# Altium PCB 蓝牙钥匙球锁20714.PcbDoc (part 2 of 2)
Units mil, origin at the board's own origin, x right, y up, seen from the top; angles counter-clockwise.
Board outline 1980 x 1974 mil, 2 copper layers (Top Layer, Bottom Layer); 82 components, 54 nets, 258 pads, 220 vias.
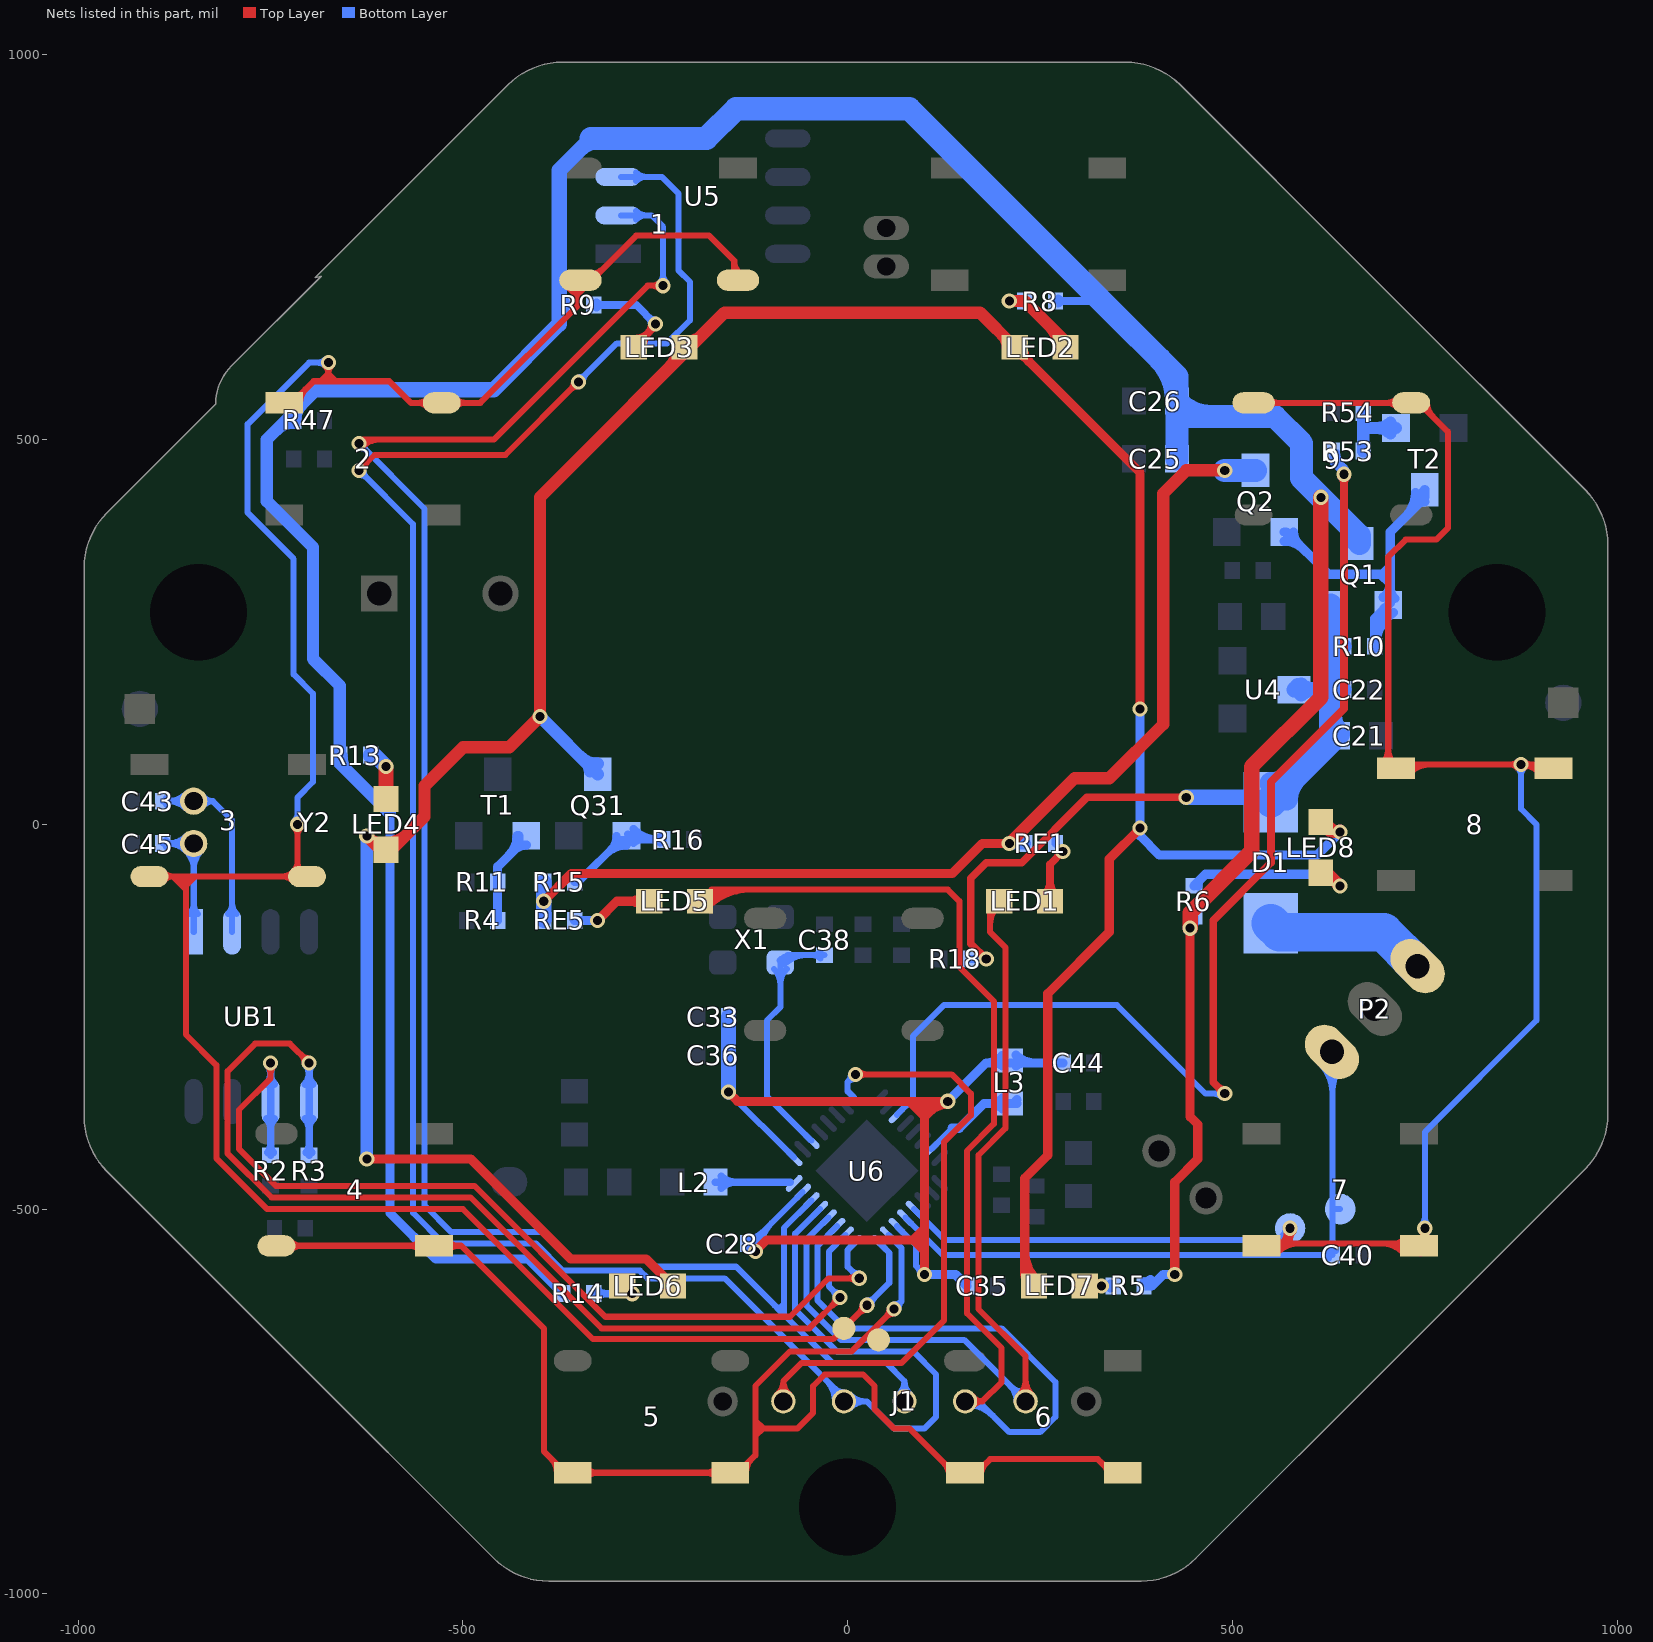
[diagram p2: the nets of this part, all layers, seen from the top]

## Via types
v1: diameter 19.68, hole 11.81, Top Layer to Bottom Layer, tented both sides, 219 vias
v2: diameter 19.68, hole 11.81, Top Layer to Bottom Layer, tented top, 1 vias

## Nets (pads, with @x,y where several pads share a name; then routed paths per layer and width w, separated by ;. In a path a pad name is that pad's centre, name@x,y a point inside that pad or via, vN(x,y) a via of type N, cw(c..) or ccw(c..) an arc to the next point about the centre after c; other vN are vias at no path point) (continued)
NetC38_2: C38.2 U6.3 X1.3 | length 443
  Bottom Layer w7.87: X1.3@-95.95,-187.88 cw(c-116.11,-208.04) -87.6,-208.04 cw(c-59.08,-208.04) X1.3@-79.25,-187.88 ; X1.3@-88.41,-176.74 cw(c-72.13,-193.02) X1.3@-72.13,-170 ; X1.3@-82.85,-182.31 cw(c-53.12,-212.03) -53.12,-170 ; U6.3@-47.38,-411.03 -105,-353.41 -105,-255 -87.6,-237.6 X1.3@-87.6,-179.53 -78.07,-170 C38.2@-30,-170 ; C38.2@-35.29,-174.29 ccw(c-45.64,-184.64) -45.64,-170 ccw(c-45.64,-155.36) C38.2@-35.29,-165.71
NetC43_1: C43.1 UB1.2 Y2.2 | length 496.5
  Bottom Layer w8: C43.1@-883.4,30 ccw(c-883.4,63.52) -859.7,39.82 cw(c-883.11,63.23) -883.11,30.12 cw(c-883.11,-2.99) -859.7,20.42 ccw(c-882.83,-2.71) C43.1@-882.83,30 ; -875.8,30.12 cw(c-875.8,44.2) -885.76,34.24 ccw(c-875.51,44.49) -875.51,30 ccw(c-875.51,15.51) -885.76,25.76 cw(c-875.23,15.23) -875.23,30.12 ; Y2.2@-838.49,22.67 cw(c-825,13.94) -825,30 ; Y2.2@-838.38,37.4 ccw(c-825,45.79) -825,30 ; UB1.2@-805.52,-116.52 ccw(c-818.86,-103.19) -800,-103.19 ccw(c-781.14,-103.19) UB1.2@-794.48,-116.52 ; UB1.2@-800,-139.76 -800,5 -825,30 ; Y2.2@-849.88,30 Y2.2@-850,30.12 -889.88,30.12 C43.1@-890,30 Y2.2@-849.88,30 ; Y2.2@-849.88,30 -825,30
NetC45_2: C45.2 UB1.1 Y2.1 | length 311.2
  Bottom Layer w8: C45.2@-890,-25 Y2.1@-850,-25 UB1.1@-850,-139.76 ; C45.2@-885.76,-29.24 cw(c-875.51,-39.49) -875.51,-25 cw(c-875.51,-10.51) C45.2@-885.76,-20.76 ; Y2.1@-859.7,-15.3 cw(c-883.11,8.11) -883.11,-25 cw(c-883.11,-58.11) -859.7,-34.7 cw(c-883.11,-58.11) -850,-58.11 cw(c-816.89,-58.11) Y2.1@-840.3,-34.7 ; UB1.1@-855.52,-116.52 ccw(c-868.86,-103.19) -850,-103.19 ccw(c-831.14,-103.19) UB1.1@-844.48,-116.52
NetD1_1: D1.1 P2.1 | length 213.7
  Bottom Layer w50: D1.1@550,-128.74 561.26,-140 696.36,-140 P2.1@740.68,-184.32
NetL2_2: L2.2 U6.32 | length 137.8
  Bottom Layer w10: L2.2@-172,-465 -75,-465 ; L2.2@-164.4,-472.6 cw(c-146.05,-490.95) -146.05,-465 cw(c-146.05,-439.05) L2.2@-164.4,-457.4
NetL3_2: L3.2 U6.15 | length 180
  Bottom Layer w7.87: U6.15@108.52,-422.16 135.68,-395
  Bottom Layer w12: 135.68,-395 145,-395 177,-363 L3.2@215,-363 ; L3.2@201.14,-369.89 ccw(c184.5,-386.53) 184.5,-363 ccw(c184.5,-339.47) L3.2@201.14,-356.11 ; L3.2@220,-363 L3.2@215,-363 ; L3.2@220,-358 L3.2@215,-363
NetLED1_1: LED1.1 RE1.2 | length 118.3
  Top Layer w10: LED1.1@255.22,-92.22 ccw(c236.44,-73.44) 263,-73.44 ccw(c289.56,-73.44) LED1.1@270.78,-92.22 ; LED1.1@263,-100 263,-51.75 v1(279.5,-35.25)
  Bottom Layer w10: RE1.2@270,-25 RE1.2@270,-20
NetLED2_1: LED2.1 R8.2 | length 152.5
  Top Layer w15.75: v1(210,680) 230,680 283,627 LED2.1@283,620 ; 262.47,647.53 cw(c234.94,620) LED2.1@273.87,620
  Bottom Layer w15.75: v1(210,680) R8.2@230,680
NetLED2_2: LED2.2 LED3.2 LED4.2 LED6.2 LED7.2 LED8.2 Q31.C | length 4353.9
  Top Layer w12: v1(-625,-435) -490,-435 -360,-565 -262,-565 LED6.2@-227,-600 ; -245.78,-581.22 cw(c-264.56,-600) LED6.2@-238,-600 ; LED6.2@-240.95,-586.05 ccw(c-229,-574.1) LED6.2@-229,-591 ; LED2.2@217,620 380,457 v1(380,150) ; LED2.2@219,611 cw(c219,594.1) LED2.2@230.95,606.05 ; LED2.2@228,620 ccw(c254.56,620) 235.78,601.22 ; 230,-583.1 ccw(c256.9,-583.1) LED7.2@237.88,-602.12 ; 230,-554.13 ccw(c285.87,-554.13) LED7.2@246.36,-593.64 ; LED7.2@242,-600 242,-597 230,-585 230,-460 260,-430 260,-220 340,-140 340,-45 v1(380,-5)
  Top Layer w16: v1(-625,-15) -607,-33 LED4.2@-600,-33 -593,-33 -550,10 -550,50 -500,100 -440,100 v1(-400,140) -400,425 -160,665 172,665 LED2.2@217,620 ; v1@-620.5,-19.5 ccw(c-607.18,-6.18) LED4.2@-601.95,-24.28 ; LED4.2@-600,-24 ccw(c-600,14.63) -572.69,-12.69 ; -232.31,592.69 ccw(c-259.63,620) LED3.2@-221,620 ; LED3.2@-210,627 ccw(c-210,655.97) -189.52,635.49 ; LED2.2@201.64,635.36 cw(c186.27,620) LED2.2@208,620 ; LED8.2@615,3 628,-10 v1(640,-10) cw(c640,9.36) LED8.2@621.64,3.22 ; LED8.2@621,-3 ccw(c634.92,10.92) v1@639.57,-8.21
  Bottom Layer w12: v1(380,150) v1(380,-5) 380,-15 405,-40 610,-40 v1(640,-10)
  Bottom Layer w16: v1(-625,-435) v1(-625,-15) ; v1(-400,140) Q31.C@-325,65 ; -348.31,88.31 ccw(c-325,111.62) Q31.C@-325,78.65 ; Q31.C@-339.49,79.49 cw(c-350.32,68.65) Q31.C@-335,68.65
NetLED3_1: LED3.1 R9.2 | length 224
  Top Layer w10: LED3.1@-278,620 -250,648 v1(-250,650) ; LED3.1@-277,631 ccw(c-277,655.14) -259.93,638.07 ; LED3.1@-266,620 cw(c-237.03,620) -257.51,640.49 ; -259.68,638.32 ccw(c-271.36,650) v1@-254.84,650
  Bottom Layer w10: R9.2@-330,675 -275,675 v1(-250,650) ; R9.2@-326.46,671.46 cw(c-317.93,662.93) -317.93,675 cw(c-317.93,687.07) R9.2@-326.46,678.54 ; v1@-254.84,650 ccw(c-266.53,650) -258.27,658.27 ccw(c-250,666.53) v1@-250,654.84
NetLED4_1: LED4.1 R13.2 | length 79.6
  Top Layer w20: LED4.1@-600,33 v1(-600,75)
  Bottom Layer w20: R13.2@-620,89 cw(c-620,74.51) -609.76,84.76 ; R13.2@-620,90 -615,90 v1(-600,75)
NetLED5_1: LED5.1 RE5.2 | length 145.3
  Top Layer w12: v1(-325,-125) -300,-100 LED5.1@-258,-100 ; LED5.1@-266.07,-107.07 ccw(c-283.14,-124.14) -283.14,-100 ccw(c-283.14,-75.86) LED5.1@-266.07,-92.93
  Bottom Layer w12: RE5.2@-355,-125 v1(-325,-125)
NetLED6_1: LED6.1 R14.2 | length 84.3
  Top Layer w10: LED6.1@-295,-600 LED6.1@-293,-600
  Bottom Layer w10: R14.2@-330,-610 v1@-285,-610 ; R14.2@-323.54,-613.54 cw(c-315,-622.07) -315,-610 cw(c-315,-597.93) R14.2@-323.54,-606.46 ; v1@-283.42,-613.42 ccw(c-291.69,-621.69) -291.69,-610 ccw(c-291.69,-598.31) v1@-283.42,-606.58
  other v1: -280,-610
NetLED7_1: LED7.1 R5.2 | length 127.8
  Top Layer w10: LED7.1@308,-607 LED7.1@308,-600 v1(330,-600) ; LED7.1@318.04,-606.26 cw(c330,-614.54) v1(330,-600) ; LED7.1@318.04,-593.74 ccw(c330,-585.46) v1(330,-600) ; v1@326.58,-603.42 ccw(c318.31,-611.69) 318.31,-600 ccw(c318.31,-588.31) v1@326.58,-596.58
  Bottom Layer w10: v1(330,-600) R5.2@345,-600 ; v1@333.42,-603.42 cw(c341.69,-611.69) 341.69,-600 cw(c341.69,-588.31) v1@333.42,-596.58 ; R5.2@341.46,-603.54 ccw(c332.93,-612.07) 332.93,-600 ccw(c332.93,-587.93) R5.2@341.46,-596.46
NetLED8_1: LED8.1 R6.2 | length 243.9
  Top Layer w16: LED8.1@615,-63 623,-63 v1(640,-80)
  Bottom Layer w12: R6.2@450,-80 465,-65 625,-65 v1(640,-80) ; R6.2@455,-80 cw(c467.07,-80) R6.2@458.54,-71.46
NetQ1_G: Q1.G Q2.G R10.2 T2.3 | length 668
  Bottom Layer w12: Q2.G@567.4,368 cw(c567.4,332.76) 592.32,357.68 ; Q2.G@567.4,380 570,380 625,325 692.46,325 ; Q2.G@579.4,380 ccw(c602.1,380) 586.05,363.95 ; R10.2@685,228.66 cw(c741.67,228.66) Q1.G@709.26,275.16 ; R10.2@685,231.42 685,267.6 Q1.G@702.4,285 ; 685,251.66 cw(c725.64,251.66) Q1.G@702.4,285 ; Q1.G@695.69,294.95 ccw(c683.88,312.45) 705,312.45 ; 705,307.7 ccw(c725.1,307.7) Q1.G@710.89,293.49 ; 725.03,400.03 ccw(c693.71,431.35) T2.3@738,431.35 ; T2.3@740.35,415.35 cw(c750,405.7) T2.3@750,419.35 ; 692.46,325 695,325 ; 692.46,325 705,312.46 ; 695,325 705,325 ; 695,325 705,335 ; Q1.G@702.4,285 705,287.6 705,312.46 ; 705,312.46 705,325 ; 705,325 705,335 ; 705,335 705,380 T2.3@740,415 ; T2.3@740,415 740,425 T2.3@750,435 750,425 T2.3@740,415
NetQ31_B: Q31.B R15.1 R16.2 | length 295.3
  Bottom Layer w10: R15.1@-355,-75 -350,-75 -295,-20 R16.2@-240,-20 ; R15.1@-355,-69 ccw(c-355,-42.44) -336.22,-61.22 ; -313.89,-38.89 cw(c-287.6,-65.18) Q31.B@-287.6,-28 ; -308.09,-33.09 ccw(c-326.18,-15) Q31.B@-300.6,-15 ; Q31.B@-285.48,-12.88 ccw(c-268.28,4.31) -268.28,-20 ccw(c-268.28,-34.31) Q31.B@-278.41,-24.19 ; Q31.B@-278.41,-5.81 ccw(c-244.14,28.46) R16.2@-244.14,-20 ; R16.2@-243.54,-23.54 ccw(c-252.07,-32.07) -252.07,-20 ccw(c-252.07,-7.93) R16.2@-243.54,-16.46
NetR1_2: 
NetR4_1: R4.1 R11.1 T1.1 | length 166.9
  Bottom Layer w12: R4.1@-455,-125 R11.1@-455,-75 -455,-55 -427.6,-27.6 T1.1@-427.6,-15 ; -439.92,-39.92 ccw(c-464.84,-15) T1.1@-429.6,-15 ; -433.65,-33.65 cw(c-417.6,-49.7) T1.1@-417.6,-27
NetR53_2: R53.2 R54.2 T2.1 | length 130.5
  Bottom Layer w16: R53.2@670,485 670,515 ; R54.2@670,535 670,515 ; T2.1@705.53,507.93 ccw(c688.46,490.86) 688.46,515 ccw(c688.46,539.14) T2.1@705.53,522.07 ; T2.1@712.6,515 670,515
P04/LED_RED: J1.3 LED5.2 U6.27 | length 1966.6
  Top Layer w7.87: LED5.2@-193.31,-96.69 cw(c-165.1,-124.9) -165.1,-85 ; LED5.2@-192,-100 -177,-85 130,-85 145,-100 145,-185 190,-230 190,-389.4 155,-424.4 155,-635.6 200,-680.6 200,-725 175,-750 ; LED5.2@-187.75,-102.26 cw(c-146.09,-143.91) -146.09,-85 ; LED5.2@-182.18,-107.82 cw(c-127.08,-162.92) -127.08,-85 ; J1.3@152.52,-750 175,-750 ; J1.3@162.25,-756.7 cw(c175,-765.49) 175,-750 ; J1.3@162.25,-743.3 ccw(c175,-734.51) 175,-750
  Bottom Layer w7.87: U6.27@-13.97,-522.38 -39.13,-547.54 -39.13,-619.06 -3.2,-655 200,-655 270,-725 270,-770 250,-790 210,-790 170,-750 J1.3@152.52,-750 ; J1.3@152.52,-753.94 cw(c152.52,-805.64) 189.08,-769.08 ; J1.3@152.52,-746.06 cw(c152.52,-778.76) 175.64,-755.64
P05/LED_GREEN: J1.2 LED1.2 U6.28 | length 1331.6
  Top Layer w7.87: 185,-131.84 cw(c226.84,-131.84) LED1.2@197.25,-102.25 ; 185,-125.64 185,-140 ; LED1.2@185,-112.83 cw(c207.83,-112.83) LED1.2@191.69,-96.69 ; LED1.2@205,-108 LED1.2@197,-100 185,-112 185,-140 ; J1.2@222.91,-741.65 ccw(c202.75,-721.49) 231.26,-721.49 ccw(c259.77,-721.49) J1.2@239.61,-741.65 ; J1.2@231.26,-750 231.26,-691.26 170,-630 170,-430 205,-395 205,-225 205,-160 185,-140
  Bottom Layer w7.87: U6.28@-25.11,-511.25 -53.7,-539.84 -53.7,-625.1 -8.8,-670 151.26,-670 J1.2@231.26,-750 ; J1.2@219.45,-750 ccw(c190.93,-750) 211.1,-729.84 ccw(c231.26,-709.67) J1.2@231.26,-738.19
P06/MOTO1: J1.5 U5.3 U6.29 | length 3207.4
  Top Layer w7.87: v1(-635,460) -615,480 -445,480 v1(-350,575) ; v1@-635,465.91 ccw(c-635,480.16) -624.92,470.08 ccw(c-614.84,460) v1@-629.09,460 ; v1@-355.91,575 cw(c-370.16,575) -360.08,564.92 cw(c-350,554.84) v1@-350,569.09
  Bottom Layer w7.87: v1@-635,454.09 cw(c-635,439.84) -624.92,449.92 cw(c-614.84,460) v1@-629.09,460 ; v1(-635,460) -565,390 -565,-505 -525,-545 -405,-545 -370,-580 -270,-580 -260,-590 -160,-590 -4.96,-745.04 J1.5@-4.96,-750 25,-750 60,-785 100,-785 115,-770 115,-715 85,-685 -14.4,-685 -68.27,-631.13 -68.27,-532.13 U6.29@-36.25,-500.11 ; v1(-350,575) -300,625 -235,625 -205,655 -205,705 -220,720 -220,820 -241.41,841.41 U5.3@-294.29,841.41 ; v1@-350,580.91 ccw(c-350,595.16) -339.92,585.08 ccw(c-329.84,575) v1@-344.09,575 ; U5.3@-275.18,835.84 cw(c-261.74,822.4) -261.74,841.41 cw(c-261.74,860.42) U5.3@-275.18,846.98 ; -28.63,-721.37 cw(c-57.26,-750) J1.5@-16.77,-750 ; -16.65,-733.35 ccw(c-4.96,-721.65) J1.5@-4.96,-738.19 ; -15.19,-734.81 cw(c-30.38,-750) J1.5@-8.9,-750 ; J1.5@3.39,-758.35 cw(c23.55,-778.51) 23.55,-750 cw(c23.55,-721.49) J1.5@3.39,-741.65
P07/MOTO0: J1.4 U5.2 U6.30 | length 2723.6
  Top Layer w7.87: v1(-635,495) -630,500 -460,500 -260,700 v1(-240,700) ; v1@-630.82,490.82 cw(c-608.67,468.67) -608.67,500 ; v1@-244.18,695.82 ccw(c-254.26,685.74) -254.26,700 ccw(c-254.26,714.26) v1@-244.18,704.18
  Bottom Layer w7.87: v1@-635,489.09 cw(c-635,474.84) -624.92,484.92 cw(c-614.84,495) v1@-629.09,495 ; v1(-635,495) -550,410 -550,-495 -515,-530 -395,-530 -360,-565 -260,-565 -250,-575 -145,-575 -95,-625 -90,-630 ; U5.2@-294.29,791.41 -255,791.41 -240,776.41 v1(-240,700) ; U5.2@-275.18,785.84 cw(c-261.74,772.4) -261.74,791.41 cw(c-261.74,810.42) U5.2@-275.18,796.98 ; v1@-244.18,704.18 ccw(c-254.26,714.26) -240,714.26 ccw(c-225.74,714.26) v1@-235.82,704.18 ; -82.83,-610 -82.83,-612.83 ; U6.30@-47.38,-488.97 -82.83,-524.43 -82.83,-612.83 ; J1.4@65.95,-741.15 ccw(c50.58,-723.78) 73.78,-723.78 ; J1.4@73.78,-750 73.78,-723.78 ; J1.4@81.61,-741.15 cw(c96.98,-723.78) 73.78,-723.78 ; -90,-630 -82.83,-622.83 ; -90,-630 -82.83,-637.17 ; -82.83,-637.17 -20,-700 50,-700 73.78,-723.78 ; -82.83,-637.17 -82.83,-622.83 ; -82.83,-622.83 -82.83,-612.83
PWR_CTL: R53.1 U6.11 | length 1619
  Top Layer w10: v1@485.16,-350 ccw(c473.47,-350) 481.73,-341.73 ccw(c490,-333.47) v1@490,-345.16 ; v1(490,-350) 475,-335 475,-125 550,-50 550,55 645,150 v1(645,455) ; v1@641.58,451.27 cw(c633.31,443) 645,443 cw(c656.69,443) v1@648.42,451.27
  Bottom Layer w7.87: U6.11@63.97,-377.62 85,-356.59 85,-275 125,-235 350,-235 465,-350 v1(490,-350) ; v1@485.82,-354.18 ccw(c475.74,-364.26) 475.74,-350 ccw(c475.74,-335.74) v1@485.82,-345.82 ; R53.1@630,485 R53.1@630,480 ; R53.1@636.06,484 ccw(c660.36,484) 643.18,466.82 ; 644.92,465.08 cw(c634.84,455) v1@649.09,455 ; R53.1@630,480 630,470 v1(645,455) 645,465 R53.1@630,480
RD1_KEYX_2: 4.2 5.2 6.2 pad.RD1 U6.23 | length 2320.6
  Top Layer w7.87: 4.2@-752.18,-547.7 -502.3,-547.7 -395,-655 -395,-815 -367.3,-842.7 -352.18,-842.7 5.2@-152.64,-842.7 ; 4.2@-724,-553.4 cw(c-710.23,-567.18) -710.23,-547.7 ; 4.2@-724,-542.27 ccw(c-710.89,-529.16) -710.89,-547.7 ; -570,-547.7 cw(c-570,-567.18) 4.2@-556.23,-553.4 ; -569.34,-547.7 ccw(c-569.34,-529.16) 4.2@-556.23,-542.27 ; 4.2@-519.27,-553.4 cw(c-505.5,-567.18) -505.5,-547.7 ; 4.2@-519.27,-542.27 ccw(c-506.17,-529.16) -506.17,-547.7 ; -385.71,-824.28 cw(c-404.26,-842.83) 5.2@-378.03,-842.83 ; 5.2@-378.49,-831.51 ccw(c-370.16,-823.17) 5.2@-370.16,-834.96 ; 5.2@-339,-848.4 cw(c-325.23,-862.18) -325.23,-842.7 ; 5.2@-339,-837.27 ccw(c-325.89,-824.16) -325.89,-842.7 ; -184.77,-842.7 cw(c-184.77,-862.18) 5.2@-171,-848.4 ; -184.11,-842.7 ccw(c-184.11,-824.16) 5.2@-171,-837.27 ; 5.2@-139.84,-834.96 ccw(c-139.84,-823.17) 5.2@-131.51,-831.51 ; 5.2@-131.97,-842.59 cw(c-108.14,-841.86) -125,-825 ; pad.RD1@40,-670 pad.RD1@30,-660 ; v1@54.09,-630 cw(c39.84,-630) 49.92,-640.08 cw(c60,-650.16) v1@60,-635.91 ; v1(60,-630) pad.RD1@30,-660 ; 124.29,-829.28 cw(c105.74,-847.83) 6.2@131.97,-847.83 ; 126.51,-831.51 ccw(c134.84,-823.17) 6.2@134.84,-834.96 ; 6.2@147.64,-837.64 6.2@147.64,-842.83 ; 6.2@147.81,-842.7 6.2@157.3,-842.7 ; 6.2@165.43,-839.96 ccw(c165.43,-828.84) 6.2@173.3,-836.7 ; 6.2@173.3,-847.43 cw(c196.25,-846.25) 180,-830 ; 329,-829 ccw(c345.4,-812.6) 6.2@345.4,-835.79 ; 6.2@333.18,-833.18 cw(c322.7,-843.67) 6.2@337.53,-843.67 ; 6.2@337.7,-842.7 337.83,-842.83 6.2@352.36,-842.83 ; 6.2@352.54,-842.7 342.7,-842.7 325,-825 185,-825 167.3,-842.7 6.2@157.3,-842.7 ; 5.2@-152.64,-842.83 5.2@-152.64,-842.7 ; 5.2@-152.64,-842.83 -152.64,-847.83 5.2@-147.64,-842.83 ; 5.2@-152.64,-842.83 5.2@-147.64,-842.83 ; 5.2@-152.64,-842.7 -152.46,-842.7 -147.46,-837.7 -147.46,-842.66 5.2@-147.64,-842.83 ; 5.2@-147.64,-842.83 -142.83,-842.83 -120,-820 -120,-795 ; -120,-795 -120,-785 ; -120,-795 -110,-785 ; -120,-785 -120,-775 ; -120,-785 -110,-785 ; -120,-775 -120,-730 -75,-685 5,-685 pad.RD1@30,-660 ; -120,-775 -110,-785 ; -110,-785 -65,-785 -45,-765 -45,-730 -30,-715 20,-715 35,-730 35,-760 60,-785 80,-785 137.83,-842.83 6.2@147.64,-842.83 ; 6.2@147.64,-842.83 157.17,-842.83 6.2@157.3,-842.7
  Bottom Layer w7.87: U6.23@52.84,-533.52 70,-550.68 70,-620 ; v1(60,-630) 70,-620 ; v1@60.03,-624.09 ccw(c60.11,-610.12) 70,-620 ; v1@65.91,-629.97 cw(c79.88,-629.89) 70,-620
RSTN: J1.6 U6.8 | length 859.4
  Top Layer w7.87: J1.6@-91.55,-741.17 ccw(c-107.07,-723.7) -83.7,-723.7 ; J1.6@-83.7,-750 -83.7,-723.7 ; J1.6@-75.85,-741.17 cw(c-60.33,-723.7) -83.7,-723.7 ; v1(10,-325) 135,-325 160,-350 160,-378.2 125,-413.2 125,-645 70,-700 -60,-700 -83.7,-723.7 ; v1@14.18,-329.18 cw(c24.26,-339.26) 24.26,-325 cw(c24.26,-310.74) v1@14.18,-320.82
  Bottom Layer w7.87: v1@4.09,-325.03 cw(c-9.88,-325.11) 0,-335 ; U6.8@8.3,-355.35 0,-347.05 0,-335 ; v1@9.97,-330.91 ccw(c9.89,-344.88) 0,-335 ; v1(10,-325) 0,-335
RX2/SETKEY: C40.1 P2.3 pad.RX2 U6.21 | length 1030
  Bottom Layer w7.87: U6.21@75.11,-511.25 123.86,-560 C40.1@630,-560 pad.RX2@630,-500 ; P2.3@614.01,-310.99 cw(c575.41,-349.59) 630,-349.59 ; P2.3@619.58,-305.42 cw(c594.42,-330.58) 630,-330.58 ; C40.1@625.71,-564.29 ccw(c615.36,-574.64) 615.36,-560 ccw(c615.36,-545.36) C40.1@625.71,-555.71 ; C40.1@625.71,-554.71 ccw(c615.36,-544.36) 630,-544.36 ccw(c644.64,-544.36) C40.1@634.29,-554.71 ; P2.3@629.32,-295.68 630,-296.36 pad.RX2@630,-500 ; 630,-346.32 cw(c679.96,-346.32) P2.3@644.63,-310.99 ; 630,-327.31 cw(c660.95,-327.31) P2.3@639.07,-305.42 ; pad.RX2@640,-500 pad.RX2@630,-500
SCL: R2.2 U6.25 UB1.6 | length 1377.5
  Top Layer w7.87: v1@-754.18,-314.18 cw(c-764.26,-324.26) -750,-324.26 cw(c-735.74,-324.26) v1@-745.82,-314.18 ; v1(-750,-310) -750,-330 -791.3,-371.3 -791.3,-421.9 -743.2,-470 -485,-470 -315,-640 -75,-640 -25,-590 v1(15,-590) ; v1@10.82,-594.18 ccw(c0.74,-604.26) 0.74,-590 ccw(c0.74,-575.74) v1@10.82,-585.82
  Bottom Layer w7.87: U6.25@8.3,-544.65 0,-552.95 0,-575 v1(15,-590) ; v1@9.09,-590 ccw(c-5.16,-590) 4.92,-579.92 ccw(c15,-569.84) v1@15,-584.09
  Bottom Layer w10: UB1.6@-754.82,-382.77 cw(c-766.44,-394.4) -750,-394.4 cw(c-733.56,-394.4) UB1.6@-745.18,-382.77 ; UB1.6@-754.82,-337.7 ccw(c-766.44,-326.08) -750,-326.08 ccw(c-733.56,-326.08) UB1.6@-745.18,-337.7 ; R2.2@-753.54,-426.46 ccw(c-762.07,-417.93) -750,-417.93 ccw(c-737.93,-417.93) R2.2@-746.46,-426.46 ; v1@-753.42,-313.42 cw(c-761.69,-321.69) -750,-321.69 cw(c-738.31,-321.69) v1@-746.58,-313.42 ; R2.2@-750,-430 UB1.6@-750,-360.24 v1(-750,-310)
SDA: R3.2 U6.26 UB1.5 | length 1517.3
  Top Layer w7.87: v1@-705.91,-310 ccw(c-720.16,-310) -710.08,-299.92 ccw(c-700,-289.84) v1@-700,-304.09 ; v1(-700,-310) -725,-285 -770,-285 -805.87,-320.87 -805.87,-427.93 -748.8,-485 -490,-485 -320,-655 -50,-655 v1(-10,-615) ; v1@-15.91,-615 cw(c-30.16,-615) -20.08,-625.08 cw(c-10,-635.16) v1@-10,-620.91
  Bottom Layer w7.87: v1@-15.91,-615 ccw(c-30.16,-615) -20.08,-604.92 ccw(c-10,-594.84) v1@-10,-609.09 ; v1(-10,-615) -24.57,-600.43 -24.57,-555.24 U6.26@-2.84,-533.52
  Bottom Layer w10: UB1.5@-704.82,-382.77 cw(c-716.44,-394.4) -700,-394.4 cw(c-683.56,-394.4) UB1.5@-695.18,-382.77 ; UB1.5@-704.82,-337.7 ccw(c-716.44,-326.08) -700,-326.08 ccw(c-683.56,-326.08) UB1.5@-695.18,-337.7 ; R3.2@-703.54,-426.46 ccw(c-712.07,-417.93) -700,-417.93 ccw(c-687.93,-417.93) R3.2@-696.46,-426.46 ; v1@-703.42,-313.42 cw(c-711.69,-321.69) -700,-321.69 cw(c-688.31,-321.69) v1@-696.58,-313.42 ; R3.2@-700,-430 UB1.5@-700,-360.24 v1(-700,-310)
TD1_KEYX_1: 1.2 2.2 3.2 pad.TD1 U6.24 | length 3785
  Top Layer w7.87: 3.2@-907.36,-67.83 3.2@-907.22,-67.7 ; 3.2@-888.64,-62.65 ccw(c-877.5,-52.88) -877.5,-67.7 ; 3.2@-888.51,-72.86 cw(c-877.5,-82.01) -877.5,-67.7 ; -734.77,-67.7 cw(c-734.77,-87.18) -721,-73.4 ccw(c-734.44,-86.84) -734.44,-67.83 ccw(c-734.44,-48.83) 3.2@-721,-62.27 ; -734.11,-67.7 ccw(c-734.11,-49.16) 3.2@-721,-62.27 ; 2.2@-732.28,547.83 -722.17,547.83 -694.16,575.84 -685,575.84 ; 2.2@-719.45,555.59 ccw(c-719.45,567.76) 2.2@-710.84,559.16 ; v1@-719.18,-4.18 cw(c-729.26,-14.26) -715,-14.26 cw(c-700.74,-14.26) v1@-710.82,-4.18 ; 3.2@-718.41,-60.54 ccw(c-720.48,-55.47) 3.2@-715,-55.47 ; 3.2@-715.65,-54.83 cw(c-722.26,-61.44) 3.2@-715.43,-67.83 ; -715,-49.87 ccw(c-697.47,-49.87) 3.2@-709.87,-62.27 ; -715,-47.78 cw(c-735.49,-47.78) 3.2@-721,-62.27 ; v1(-715,0) 3.2@-715,-55.47 ; 3.2@-711.75,-60.88 cw(c-708.89,-55.47) 3.2@-715,-55.47 ; 2.2@-711.57,547.72 cw(c-685.72,547.72) -704,566 ; 3.2@-702.64,-67.83 3.2@-702.78,-67.7 ; 3.2@-700,-65.24 -702.46,-67.7 3.2@-702.78,-67.7 ; v1@-679.16,595.8 cw(c-689.03,585.84) -675,585.84 ; v1(-675,600) -675,585.84 ; v1@-670.84,595.8 ccw(c-660.97,585.84) -675,585.84 ; -559.66,547.7 cw(c-559.66,528.22) 2.2@-545.89,541.99 ; -559,547.7 ccw(c-559,566.24) 2.2@-545.89,553.13 ; 2.2@-510.11,542.27 cw(c-497,529.16) -497,547.7 ; 2.2@-510.11,553.4 ccw(c-496.34,567.18) -496.34,547.7 ; 1.2@-365,700 -352.19,687.18 ; 1.2@-352.19,697.3 -352.19,687.82 ; 1.2@-347.36,707.17 1.2@-332.83,707.17 ; 1.2@-344.03,700.03 ccw(c-338.05,687.22) -352.18,687.22 ; 1.2@-334.57,715.04 ccw(c-334.57,738.23) -318.17,721.83 ; 1.2@-326.69,707.17 cw(c-311.87,707.17) -322.35,717.65 ; 1.2@-150,700 -147.46,702.54 -147.46,732.46 ; 1.2@-137.93,713.48 cw(c-123.79,732.46) -147.46,732.46 ; v1@19.09,-625 cw(c4.84,-625) 14.92,-635.08 cw(c25,-645.16) v1@25,-630.91 ; v1(25,-625) -19,-669 -331,-669 -500,-500 -754.4,-500 -820.43,-433.97 -820.43,-312.97 -860,-273.4 -860,-85.2 ; 3.2@-885,-67.7 -877.5,-67.7 ; 3.2@-885,-67.7 -907.18,-67.7 3.2@-885,-67.7 ; -877.5,-67.7 -870,-67.7 ; -877.5,-67.7 -860,-85.2 ; -870,-67.7 -860,-67.7 ; -870,-67.7 -860,-77.7 ; -860,-85.2 -860,-80 ; -860,-80 -860,-77.7 ; -860,-80 -847.7,-67.7 ; -860,-77.7 -860,-67.7 ; -860,-67.7 -847.7,-67.7 ; -847.7,-67.7 -835,-67.7 -745,-67.7 3.2@-702.78,-67.7 ; 3.2@-715,-55.47 3.2@-702.78,-67.7 ; -685,575.84 -675,585.84 ; -685,575.84 -675,575.84 ; -675,575.84 -675,585.84 ; -675,575.84 -665,575.84 ; -675,585.84 -665,575.84 ; -665,575.84 -595.84,575.84 -567.7,547.7 -477.3,547.7 -352.19,672.82 -352.19,687.18 ; -352.19,687.18 -352.19,687.82 ; -352.19,687.82 1.2@-332.83,707.17 ; 1.2@-332.83,707.17 -275,765 -180,765 -147.46,732.46
  Bottom Layer w7.87: v1@-719.18,4.18 ccw(c-729.26,14.26) -715,14.26 ccw(c-700.74,14.26) v1@-710.82,4.18 ; v1(-715,0) -715,35 -695,55 -695,170 -720,195 -720,345 -780,405 -780,520 -700,600 v1(-675,600) ; v1@-679.18,595.82 ccw(c-689.26,585.74) -689.26,600 ccw(c-689.26,614.26) v1@-679.18,604.18 ; v1(25,-625) 54,-596 54,-556.95 U6.24@41.7,-544.65 ; v1@25,-619.09 ccw(c25,-604.84) 35.08,-614.92 ccw(c45.16,-625) v1@30.91,-625
TX2_KEYX_3: 7.2 8.2 9.2 pad.TX2 U6.20 | length 2990.8
  Top Layer w7.87: 7.2@537.64,-547.83 540.47,-545 575,-545 ; 9.2@546,542.27 cw(c559.11,529.16) 559.11,547.7 ; 9.2@546,553.4 ccw(c559.78,567.18) 559.78,547.7 ; 9.2@547.46,547.7 9.2@742.36,547.7 ; 7.2@550,-550.51 547.82,-552.7 562.3,-552.7 ; 7.2@557.6,-539.86 ccw(c570,-527.46) 570,-545 ; 7.2@559.15,-555.71 cw(c585,-581.55) 585,-545 ; 7.2@561.02,-551.31 ccw(c543.25,-525) v1(575,-525) 575,-545 ; 7.2@561.26,-547.19 ccw(c549.09,-529.18) 570.82,-529.18 cw(c560.74,-539.26) 575,-539.26 cw(c589.26,-539.26) v1@579.18,-529.18 ; 565.43,-550.14 cw(c577.84,-562.54) 577.84,-545 ; 8.2@694.27,78.4 ccw(c674.51,98.16) 702.46,98.16 ccw(c730.41,98.16) 8.2@710.65,78.4 ; 695,-545 cw(c695,-581.55) 7.2@720.85,-555.71 ; 700.22,547.7 ccw(c700.22,567.18) 9.2@714,553.4 ; 700.89,547.7 cw(c700.89,529.16) 9.2@714,542.27 ; 8.2@702.46,85.52 ccw(c712.53,85.52) 8.2@705.41,78.4 ; 710,-545 ccw(c710,-527.46) 7.2@722.4,-539.86 ; 714.01,-545 cw(c714.01,-562.54) 7.2@726.41,-550.14 ; 8.2@725.43,72.83 cw(c737.17,61.1) 8.2@737.17,77.7 ; 8.2@731,67.27 cw(c756.18,42.09) 756.18,77.7 ; 7.2@739,-552.27 ccw(c712.44,-525.71) v1@750,-525.71 ; 7.2@742.36,-547.83 739.53,-545 575,-545 ; 9.2@742.36,547.83 780,510.2 780,385 765,370 725,370 702.46,347.46 702.46,77.7 8.2@907.18,77.7 ; 7.2@744.57,-557.83 ccw(c731.45,-544.72) 7.2@750,-544.72 ; 9.2@745.16,539.96 cw(c745.16,527.7) 753.83,536.37 ; v1@745.82,-529.18 cw(c735.74,-539.26) 750,-539.26 cw(c764.26,-539.26) v1@754.18,-529.18 ; 7.2@752.54,-552.7 750,-552.7 v1(750,-525) v1@752.54,-527.54 ; 9.2@753.03,547.83 ccw(c778.79,547.83) 760.58,529.62 ; 860.41,77.7 cw(c860.41,62.97) v1@870.82,73.38 ; 861.08,77.7 ccw(c861.08,91.48) v1@870.82,81.73 ; v1@873.82,77.7 cw(c873.82,42.09) 8.2@899,67.27 ; v1@879.18,73.38 cw(c889.59,62.97) 889.59,77.7 ; v1@879.18,81.73 ccw(c888.92,91.48) 888.92,77.7 ; 8.2@892.83,77.7 cw(c892.83,61.1) 8.2@904.57,72.83
  Bottom Layer w7.87: U6.20@86.25,-500.11 126.14,-540 560,-540 v1(575,-525) ; pad.TX2@569.09,-525 cw(c554.84,-525) 564.92,-535.08 cw(c575,-545.16) pad.TX2@575,-530.91 ; v1@745.82,-520.82 ccw(c735.74,-510.74) 750,-510.74 ccw(c764.26,-510.74) v1@754.18,-520.82 ; v1(750,-525) 750,-400 895,-255 895,0 875,20 v1(875,77.56) ; v1@870.82,73.38 cw(c860.74,63.3) 875,63.3 cw(c889.26,63.3) v1@879.18,73.38
V6V: C25.1 C26.1 Q1.D R5.1 R6.1 R8.1 R9.1 R13.1 R14.1 R47.2 U5.4 | length 4954.8
  Top Layer w12: v1(425,-585) 425,-465 455,-435 455,-390 445,-380 v1(445,-135)
  Top Layer w20: v1(445,-135) 445,-115 525,-35 525,75 615,165 v1(615,425)
  Bottom Layer w10: R8.1@270,680 330,680 ; R8.1@273.54,676.46 cw(c282.07,667.93) 282.07,680 cw(c282.07,692.07) R8.1@273.54,683.54
  Bottom Layer w12: -595,14 -595,-505 -535,-565 -415,-565 R14.1@-370,-610 ; R5.1@385,-600 395,-600 410,-585 v1(425,-585) ; R5.1@385,-595 ccw(c385,-582.93) R5.1@393.54,-591.46 ; v1@443.14,-131.64 ccw(c436.7,-120) R6.1@450,-120 450,-130 v1(445,-135)
  Bottom Layer w16: -742.19,512.81 cw(c-720,490.62) R47.2@-720,522 ; R47.2@-718,526 cw(c-691.44,526) -710.22,544.78 ; -690,565 -755,500 -755,420 -695,360 -695,215 -660,180 R13.1@-660,90 -660,79 -595,14 ; R13.1@-658,89 ccw(c-629.03,89) -649.51,68.51
  Bottom Layer w20: -690,565 -460,565 -375,650 -375,850 -333.59,891.41 ; -375,661.93 cw(c-357.93,661.93) R9.1@-370,674 ; -375,688.07 ccw(c-357.93,688.07) R9.1@-370,676 ; -348.99,876.01 cw(c-316.18,843.2) U5.4@-316.18,889.6 ; -342.29,882.71 cw(c-323.41,863.82) U5.4@-316.64,889.66
  Bottom Layer w30: -333.59,891.41 -183.59,891.41 -145,930 80,930 330,680 428,582 428,530 ; 405.49,604.51 cw(c352.94,551.97) C26.1@427.25,551.97 ; C25.1@428,475 428,530 ; C26.1@428.53,548.56 ccw(c473.34,593.37) 473.34,530 ; Q1.D@655.39,384.61 cw(c639.44,368.65) Q1.D@662,368.65 ; Q1.D@665,365 665,375 v1(615,425) 590,450 590,495 555,530 428,530
VBAT: C21.1 C22.1 D1.2 Q1.S R10.1 R18.1 U4.3 | length 1099.6
  Top Layer w7.87: v1@436.08,30.82 ccw(c426,20.74) 426,35 ccw(c426,49.26) v1@436.08,39.18
  Top Layer w10: v1(180,-175) 160,-155 160,-70 180,-50 226.02,-50 311.02,35 v1(440,35)
  Bottom Layer w10: R18.1@160,-175 v1(180,-175)
  Bottom Layer w20: v1(440,35) D1.2@543.74,35 ; U4.3@580,175 U4.3@585,180 ; U4.3@585,175 C22.1@645,175 ; U4.3@589.31,169.34 cw(c602.97,155.69) 602.97,175 cw(c602.97,194.31) U4.3@589.31,180.66 ; C21.1@625.6,115 C21.1@635,115 ; 627.6,231.42 R10.1@645,231.42
  Bottom Layer w30: D1.2@550,28.74 627.6,106.34 627.6,231.42 Q1.S@627.6,285 ; D1.2@550,53.11 ccw(c550,111.94) 591.6,70.34 ; D1.2@570.43,32.68 cw(c610.26,32.68) D1.2@582.1,60.84 ; 627.6,141.47 ccw(c661.5,141.47) C21.1@637.53,117.5
VDD: C28.2 C33.2 C35.2 C36.2 C44.2 L3.1 U6.1 U6.22 U6.31 | length 1762.4
  Top Layer w11.81: v1(-155,-347.95) -142.95,-360 80,-360 ; v1(-120,-555) -105,-540 85,-540 ; v1(100,-585) 100,-555 ; 100,-510 100,-525 ; 106.21,-373.79 cw(c130,-397.58) v1@130,-363.94 ; 115,-365 cw(c122.53,-372.53) v1@127.98,-363.38 ; v1(130,-360) 120,-360 ; 80,-360 100,-380 ; 80,-360 100,-360 ; 85,-540 100,-555 ; 85,-540 100,-540 ; 85,-540 100,-525 ; 100,-555 100,-540 ; 100,-540 100,-525 ; 100,-525 100,-380 ; 100,-380 120,-360 ; 100,-380 100,-360 ; 100,-360 120,-360
  Bottom Layer w7.87: v1@-155,-353.85 cw(c-155,-368.11) -144.92,-358.03 cw(c-134.84,-347.95) v1@-149.09,-347.95 ; v1(-155,-347.95) U6.1@-69.65,-433.3 ; C28.2@-130,-545 -125.68,-545 U6.31@-58.52,-477.84 ; C28.2@-130,-537.94 ccw(c-130,-510.45) -110.56,-529.89 ; C28.2@-129.84,-555 cw(c-115.76,-555) C28.2@-125.72,-545.04 ; C28.2@-121.97,-555 cw(c-88.87,-555) -112.27,-531.6 ; v1@-114.09,-555 cw(c-61.99,-555) -98.83,-518.16 ; U6.22@63.97,-522.38 89,-547.41 89,-574 v1(100,-585) ; v1@94.09,-585 ccw(c79.84,-585) 89.92,-574.92 ccw(c100,-564.84) v1@100,-579.09
  Bottom Layer w11.81: v1(130,-360) 180,-310 ; 191.51,-310 cw(c191.51,-323.52) L3.1@201.07,-313.96 ; L3.1@200.58,-300.57 cw(c180,-282.83) 180,-310 ; L3.1@218.93,-313.96 cw(c228.49,-323.52) 228.49,-310 ; L3.1@218.93,-300.04 ccw(c242.97,-276) 242.97,-310 ; C44.2@280,-310 180,-310
  Bottom Layer w12: C28.2@-130,-545 v1(-120,-555) ; v1(100,-585) 140,-585 C35.2@155,-600 ; C35.2@146.46,-591.46 ccw(c155,-582.93) C35.2@155,-595
  Bottom Layer w20: v1(-155,-347.95) C36.2@-155,-300 C33.2@-155,-250
VDD3V3: Q2.D R15.2 RE1.1 RE5.1 | length 1402.7
  Top Layer w12: v1(-395,-100) -359,-64 136,-64 175,-25 v1(210,-25)
  Top Layer w16: v1(210,-25) 295,60 340,60 410,130 410,430 440,460 v1(490,460)
  Bottom Layer w16: v1(210,-25) RE1.1@230,-25
  Bottom Layer w20: RE5.1@-395,-125 R15.2@-395,-75
  Bottom Layer w30: v1(490,460) Q2.D@530,460
pads on no net: U5. U5.1 U6.9 U6.13 UB1. UB1.3 UB1.7 Y2.3

## Polygon pours and split planes (outlines as drawn)
GND on Bottom Layer "Top Layer-No Net" (hatched 45Degree grid 9 track 11, remove dead copper, pour order 4): -1000,1000 1000,1000 1000,-1000 -1000,-1000 -1000,1000
GND on Top Layer "Top Layer-No Net" (hatched 45Degree grid 9 track 11, remove dead copper, pour order 3): -1000,1000 1000,1000 1000,-1000 -1000,-1000 -1000,1000

## Keep-outs
Keep-Out Layer:
  circle w5: c0,299.21 r342.52
  pour cut-out: -825,-55 -810,-40 -810,50 -825,65 -870,65 -885,50 -885,-40 -870,-55
  pour cut-out: 0,685 -15,700 -15,800 0,815 85,815 100,800 100,700 85,685
  lines w5: -690.26,-698.87 cw(c0,0) -690.26,698.87 ; -690.24,-698.86 ccw(c-667.1,-667.01) -635.25,-690.15 -609.29,-654.42 ; -690.24,698.86 cw(c-667.1,667.01) -635.25,690.15 -608.94,653.94 ; -608.96,-653.97 cw(c-521.37,-717.6) -433.78,-781.24 -460.07,-817.43 ccw(c-428.22,-840.57) -451.36,-872.42 ccw(c-0.01,0) 451.37,-872.44 ccw(c428.22,-840.57) 460.07,-817.43 434.1,-781.69 ; -608.97,653.96 ccw(c-521.38,717.59) -434.14,781.71 -460.07,817.43 cw(c-428.22,840.57) -451.36,872.42 ; -451.37,872.44 cw(c-0.01,-0.01) 451.36,872.43 cw(c428.22,840.57) 460.07,817.43 433.75,781.2 ; 433.77,-781.25 cw(c521.36,-717.61) 608.95,-653.97 635.24,-690.15 ; 433.77,781.25 ccw(c521.36,717.61) 608.95,653.97 ; 609.28,654.4 635.25,690.15 cw(c667.1,667.01) 690.24,698.86 ; 635.25,-690.15 ccw(c667.1,-667.01) 690.24,-698.86 ; 690.25,-698.87 ccw(c-0.01,-0.01) 690.25,698.87

## Other copper
Top Layer:
  region net GND: 517.86,-482.14 477.86,-442.14 440,-480 480,-520
  region net GND: 480,-530 480,-480 440,-480 440,-530
  region net GND: 495,-475 495,-425 470,-425 470,-475
Bottom Layer:
  region net KEYY_3: 65.87,-307.93 65.87,-290 57.93,-290 57.93,-307.93
  region net V6V: 285,710 285,745 255,745 255,710
  region net V6V: 295,685 295,725 255,725 255,685
  region net NetLED2_1: 235,680 220,695 205,680 220,665
  region net NetLED2_1: 245,665 245,695 220,695 220,665
  region net V6V: 330,665 330,695 255,695 255,665
  region net NetLED3_1: -305,675 -320,690 -335,675 -320,660
  region net NetLED3_1: -320,660 -320,690 -345,690 -345,660
  region net VDD3V3: 535,460 510,485 485,460 510,435
  region net VDD3V3: 550,435 550,485 510,485 510,435
  region net RX2/SETKEY: 630,-560 615,-545 600,-560 615,-575
  region net RX2/SETKEY: 640,-545 627.5,-532.5 615,-545 627.5,-557.5
  region net RX2/SETKEY: 640,-575 640,-545 615,-545 615,-575
  region net VBAT: 170,-190 170,-160 150,-160 150,-190
  region net M3V3: 127,-444 127,-438 113,-438 113,-444
  region net BAT_ADC: 130,-190 130,-160 5,-160 5,-190
  region net NetLED8_1: 465,-95 465,-60 435,-60 435,-95
  region net V6V: 465,-145 465,-110 435,-110 435,-145
  region net NetLED4_1: -590,75 -590,105 -630,105 -630,75
  region net GND: -187.07,-335 -187.07,-212.78 -240,-212.78 -240,-335
  region net V6V: 405,-615 405,-585 370,-585 370,-615
  region net NetLED7_1: 360,-615 360,-585 320,-585 320,-615
  region net GND: 362.04,-317.04 340,-295 327.5,-307.5 349.54,-329.54
  region net GND: 340,-310 340,-295 310,-295 310,-310
  region net GND: 350,-390 350,-305 310,-305 310,-390
  region net VDD: -105,-560 -105,-525 -145,-525 -145,-560
  region net NetLED6_1: -300.86,-609.14 -315,-595 -330,-610 -315.86,-624.14
  region net V6V: -360,-625 -360,-595 -385,-595 -385,-625
  region net NetLED6_1: -315,-625 -315,-595 -340,-595 -340,-625
  region net VDD: 170,-615 170,-580 135,-580 135,-615
  region net GND: 800,500 800,550 751.9,550 751.9,500
  region net GND: 533.31,-488.31 472.35,-427.34 440.44,-459.25 501.41,-520.21
  region net GND: 538.91,-525 538.91,-463.02 430,-463.02 430,-525
  region net NetC37_1: 215,-470 215,-440 185,-440 185,-470
  region net NetC37_2: 215,-510 215,-485 190,-485 190,-510
  region net NetC34_1: 260,-525 260,-495 230,-495 230,-525
  region net GND: 735,75 735,204.42 665,204.42 665,75
  region net GND: -32.38,-140 -32.38,-90 -122.95,-90 -122.95,-140
  region net GND: 227.69,-635 227.69,-575 180,-575 180,-635
  region net GND: -163.92,-170.08 -191.5,-142.5 -213.33,-164.33 -185.76,-191.91
  region net GND: -143,-215 -143,-161 -230,-161 -230,-215
  region net GND: -155,-560 -155,-518 -225,-518 -225,-560
  region net GND: 85,-450 85,-425 58.41,-425 58.41,-450
  region net GND: 585,240 585,325 530,325 530,240
  region net GND: 575,285 575,350 535,350 535,285
  region net GND: 390,425 390,570 335,570 335,425
  region net GND: 390,570 344.36,615.64 294.86,566.14 340.5,520.5
  region net GND: -35.72,775 -35.72,855 -135,855 -135,775
  region net GND: 535,105 535,170 475,170 475,105
  region net GND: -645,-570.82 -645,-498.5 -717.32,-498.5 -717.32,-570.82
  region net GND: -675,-184.79 -675,-82.62 -720,-82.62 -720,-184.79
  region net GND: -280,-365 -280,-305 -423.54,-305 -423.54,-365
  region net GND: -705,440 -705,490 -735,490 -735,440
  region net GND: -915,-76.26 -915,55 -957.17,55 -957.17,-76.26
  region net GND: 805,470 805,515 770,515 770,470
  region net GND: 640,520 640,563.5 600.06,563.5 600.06,520
  region net GND: -350,-50 -350,27.6 -380,27.6 -380,-50
  region net NetC37_2: 202,-498 189,-485 177,-497 190,-510
  region net VBAT: 185,-175 170,-160 155,-175 170,-190
  region net GND: 713.34,-615 713.34,-535 655,-535 655,-615
  region net SCL: -735,-440 -735,-420 -765,-420 -765,-440
  region net SCL: -735,-420 -750,-405 -765,-420 -750,-435
  region net SDA: -685,-440 -685,-420 -715,-420 -715,-440
  region net SDA: -685,-420 -700,-405 -715,-420 -700,-435
  region net GND: -475,-90 -475,20.38 -515,20.38 -515,-90
  region net GND: -330,-20 -330,25 -362.4,25 -362.4,-20
  region net GND: -330,-20 -349.8,-0.2 -374.8,-25.2 -355,-45
  region net NetBZ1_2: -435,40 -435,85 -475,85 -475,40
  region net NetBZ1_2: -435,85 -455,105 -475,85 -455,65
  region net BEEP: -480,-140 -480,-110 -510,-110 -510,-140
  region net BEEP: -470,-150 -495,-125 -510,-140 -485,-165
  region net BEEP: -470,-165 -470,-150 -485,-150 -485,-165
  region net NetLED5_1: -345,-140 -345,-110 -370,-110 -370,-140
  region net NetLED5_1: -330,-125 -345,-110 -360,-125 -345,-140
  region net VDD: 145,-605 120,-580 110,-590 135,-615
  region net VDD: 140,-600 140,-585 125,-585 125,-600
  region net MOTO-: 35,760 65,760 75,770 75,795 60,810 40,810 25,795 25,770
  region net MOTO+: 75,730 65,740 25,740 15,730 15,715 25,705 65,705 75,715
  region net M3V3: 178,-402 155,-425 130,-425 115,-440 125,-450 150,-450 182,-418 253,-418 280,-445 325,-445 332,-438 332,-417 315,-410 295,-390 295,-350 290,-345 270,-345 265,-350 265,-402
  pour cut-out: -85,-405 -50,-440 -50,-490 -75,-515 -315,-515 -350,-550 -525,-550 -550,-525 -550,-400 -525,-375 -400,-375 -390,-365 -315,-365 -275,-405
  region net NetC30_2: -465,-440 -390,-440 -375,-425 -375,-385 -370,-380 -340,-380 -335,-385 -335,-480 -345,-490 -465,-490 -475,-480 -475,-450
  region net NetC30_1: -310,-445 -315,-450 -315,-480 -310,-485 -215,-485 -210,-480 -210,-450 -215,-445
  region net NetL2_2: -190,-450 -190,-480 -185,-485 -155,-485 -145,-475 -75,-475 -65,-465 -65,-460 -145,-460 -155,-445 -185,-445
  region net GND: -105,-95 285,-95 285,-135 265,-145 -105,-145 -115,-135 -115,-105
  region net M3V3: 470,395 475,400 510,400 515,395 515,235 520,230 520,195 515,190 475,190 470,195
  pour cut-out: -140,-425 -125,-440 -125,-485 -140,-500 -455,-500 -475,-480 -475,-440 -460,-425
  region net VBAT: 510,-15 465,30 510,75 540,75 555,90 555,190 565,200 590,200 600,210 600,295 610,305 645,305 655,295 655,80 600,25 600,-5 590,-15
  region net GND: 234,-481 225,-472 225,-445 235,-435 255,-435 285,-465 340,-465 375,-500 375,-525 290,-525 275,-510 275,-492 264,-481
  region net VDD: 295,-300 285,-290 190,-290 170,-310 170,-325 290,-325 295,-320
  region net NetL3_2: 235,-350 230,-345 185,-345 165,-365 165,-380 230,-380 235,-375

## Silkscreen, mask and mechanical layers (free items; w line width, h text height)
Top Overlay:
  circle w3.94: c843.7,275.59 r106.3
  circle w3.94: c0,-887.01 r106.3
  circle w3.94: c-843.7,275.59 r106.3
  circle w3.94: c843.7,275.59 r106.3
  circle w3.94: c0,-887.01 r106.3
  circle w3.94: c-843.7,275.59 r106.3
  text "TL-101" at -550,-300 h60
  text "JYD-QS" at -450,-425 h40
  text "20-7-14" at -450,-500 h40
  text "V1.0" at -125,-500 h40
  text "TD1" at 10,-615 h30 r45
  text "TD1" at 65,-655 h30 r45
Bottom Overlay:
  lines w3: -299.21,125.79 -299.21,-492.13 299.21,-492.13 299.21,124.21 ; -165.35,605.35 -165.35,807.09 165.35,807.09 165.35,609.65
  text "M-" at 175,825 h30 r180
  text "M+" at 175,775 h30 r180
  text "+" at -650,270 h60
  text "VBT" at 850,-275 h30 r135
  text "GND" at 800,-325 h30 r135
  text "KEY" at 750,-375 h30 r135
  text "RF" at -525,-490 h40 r90
  text "TX2" at 585,-500 h30 r45
  text "RX2" at 700,-525 h30 r45
  text "GND" at -175,-700 h30 r270
  text "RST" at -100,-700 h30 r270
  text "P06" at -20,-700 h30 r270
  text "P07" at 60,-700 h30 r270
  text "P04" at 165,-800 h30 r90
  text "P05" at 250,-800 h30 r90
  text "3V3" at 325,-800 h30 r90
Mechanical 1:
  text "工艺要求:" at -845,1770 h100
  text "1> 板材:FR-4" at -845,1570 h50
  text "4> 阻焊:顶层绿油" at -220,1570 h50
  text "7> 板框: Keep-out 层" at 455,1570 h50
  text "2> 板厚:1.6   mm" at -845,1470 h50
  text "5> 阻焊:底层绿油" at -220,1470 h50
  text "8> 拼板: 拼板拖模披锋总体<=50mm" at 455,1470 h50
  text "3> 过孔:盖油" at -845,1370 h50
  text "6> 字符:白色双面" at -220,1370 h50
  text "9> 拼板: 接桥耗材不能留有刺刀或尖刺形状" at 455,1370 h50

## Dimensions
982.28,-118.11 to -982.28,-118.11 on Mechanical 1